# Altium PCB lm4550.PcbDoc
Units mil, origin at the board's own origin, x right, y up, seen from the top; angles counter-clockwise.
Board outline 1970 x 820 mil, 2 copper layers (Top Layer, Bottom Layer); 38 components, 32 nets, 144 pads, 42 vias.
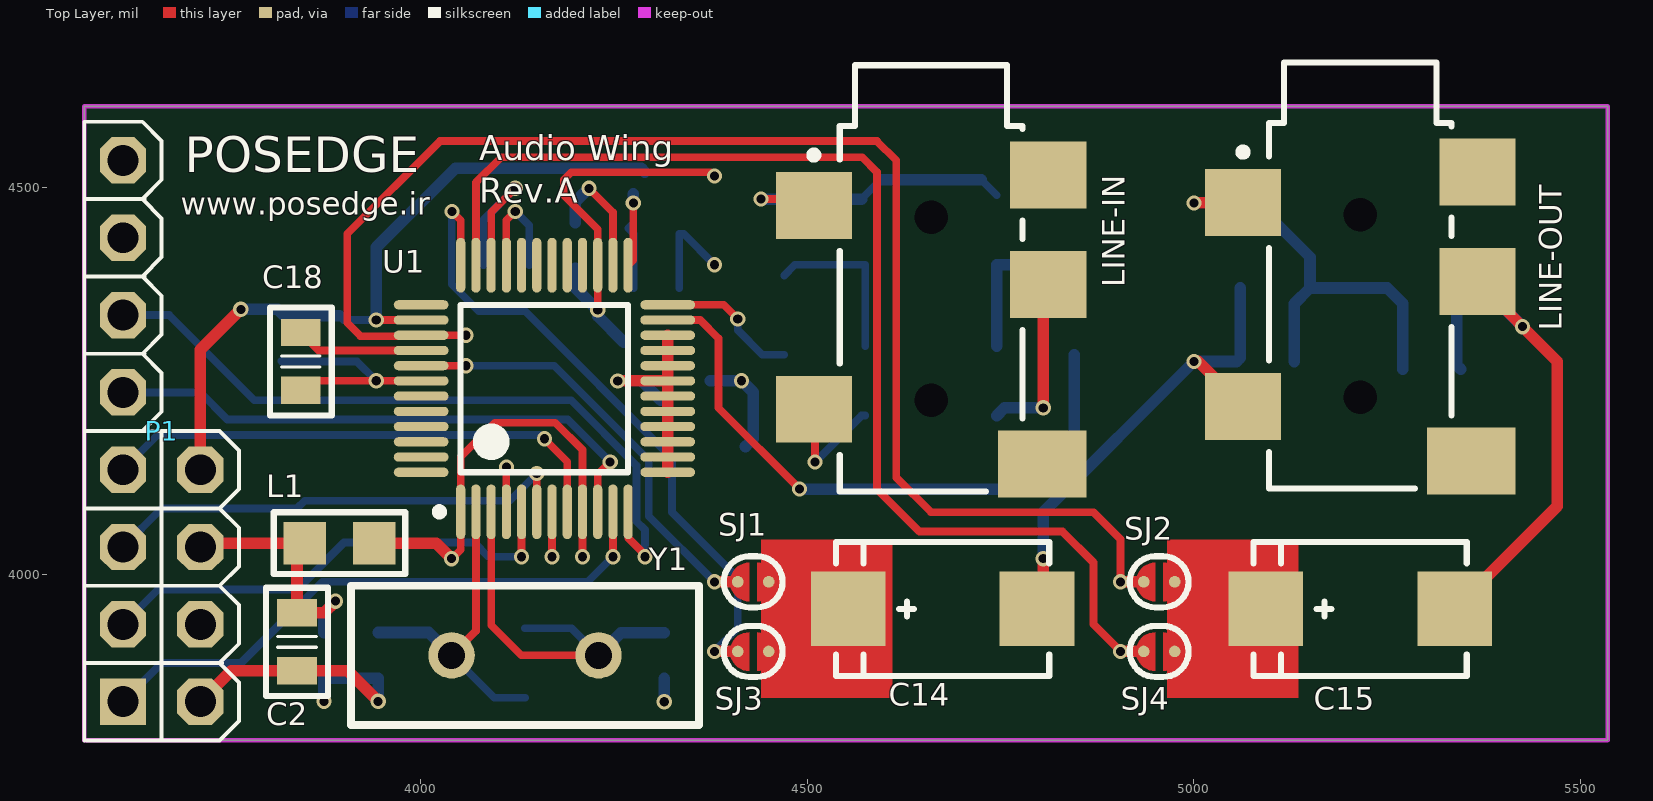
[diagram p0: Top Layer view]
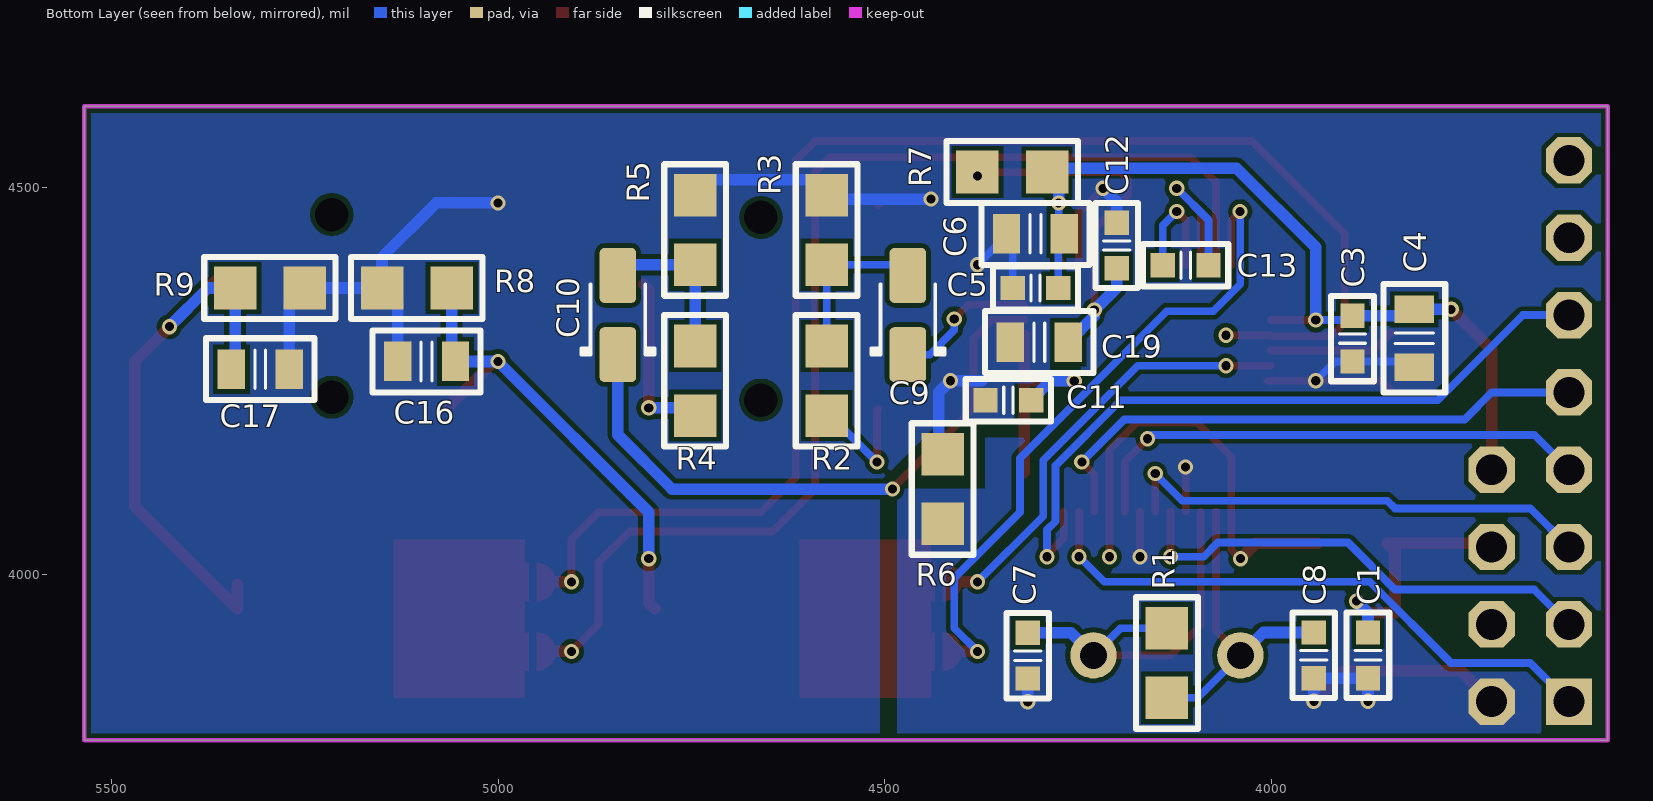
[diagram p1: Bottom Layer view, seen from below]

## Layer stack, top to bottom
Top Solder: solder mask 0.4, Solder Resist, Dk 3.5
Top Layer: signal copper 1.4
Dielectric1: dielectric 12.6, FR-4, Dk 4.8
Bottom Layer: signal copper 1.4
Bottom Solder: solder mask 0.4, Solder Resist, Dk 3.5

## Board outline
3565,3785 5535,3785 5535,4605 3565,4605

## Design rules (kind name [scope] priority, off if disabled: settings)
Clearance [All] p1: gap=6
FabricationTestpoint [(IsPad And (OnTopLayer Or OnBottomLayer))] p1: side=3 testpointundercomponent=TRUE minsize=40 maxsize=100 preferedsize=60 minholesize=0 maxholesize=40 preferedholesize=32 testpointgrid=1 allowsidetop=TRUE allowsidebottom=TRUE usegrid=TRUE gridtolerance=0.01
PolygonConnect [All] p1: connectstyle=Direct reliefconductorwidth=10 reliefentries=4 polygonreliefangle="90 Angle" airgapwidth=10
RoutingVias [All] p1: holewidth=11.81 width=19.68 viastyle="Through Hole" minholewidth=11.81 minwidth=19.68 maxholewidth=11.81 maxwidth=19.68
SolderMaskExpansion [All] p1: expansion=4
Width [All] p1: maxlimit=20 minlimit=6 preferedwidth=10
29 further rules are at their usual default settings.

## Components (designator, comment, footprint, x,y, rotation, side; value= is the part's Value field where it differs from the comment)
C1 "100nF" C0603 3875,3895 r90 bottom
C2 "4.7uF" C0805 3840,3912.4 r90 top
C3 "100nF" C0603 3895,4304.53 r90 bottom
C4 "4.7uF" C0805 3815,4305 r90 bottom
C5 "100nF" C0603 4305,4370 r180 bottom
C6 "4.7uF" C0805 4305,4440 r180 bottom
C7 "33pF" C0603 4315,3894.53 r270 bottom
C8 "33pF" C0603 3945,3895 r270 bottom
C9 "1uF" CPM3216 4470,4335 r90 bottom
C10 "1uF" CPM3216 4845,4335 r90 bottom
C11 "100nF" C0603 4340,4225 r0 bottom
C12 "100nF" C0603 4200,4425 r270 bottom
C13 "22nf" C0603 4110.79,4399.45 r0 bottom
C14 "220uF" CPM7343 4675,3955 r0 top
C15 "220uF" CPM7343 5215,3955 r0 top
C16 "220pF" C0805 5092.4,4275 r180 bottom
C17 "220pF" C0805 5307.4,4265 r0 bottom
C18 "220pF" C0805 3845,4275 r90 top
C19 "3.3uF" C0805 4300,4300 r180 bottom
L1 "27uH" R0805 3895,4040 r180 top
LINE-IN "LINE-IN" PJ-386D 4660,4461.22 r270 top locked
LINE-OUT "LINE-OUT" PJ-386D 5215,4465 r270 top locked
P1 "WING8WING8_NOHOLES" WINGSIDE_8BIT_NOHOLES 3565,4585 r270 top
R1 "1M" R0805 4135,3885 r90 bottom
R2 "6.81K" R0805 4575,4250 r90 bottom
R3 "6.81K" R0805 4575,4445 r270 bottom
R4 "6.81K" R0805 4745,4250 r90 bottom
R5 "6.81K" R0805 4745,4445 r270 bottom
R6 "0R" R0805 4425,4110 r90 bottom
R7 "10K" R0805 4335,4520 r180 bottom
R8 "100K" R0805 5105,4370 r180 bottom
R9 "100K" R0805 5295,4370 r0 bottom
SJ1 "Solder Junction" "Solde Junction" 4430,3990 r180 top
SJ2 "Solder Junction" "Solde Junction" 4955,3990 r180 top
SJ3 "Solder Junction" "Solde Junction" 4430,3900 r180 top
SJ4 "Solder Junction" "Solde Junction" 4955,3900 r180 top
U1 "LM4550BVH" VBH48A_N 4160,4240 r90 top locked
Y1 "24.578MHz" HC-49-S3 4230,3895 r180 top locked

## Footprints (in the part's own frame and the unit in brackets; to place one, negate y for a bottom-side part, rotate by r counter-clockwise, add the part's x,y. Pads: shape width x height; smd on the part's side, far side on the other; paste and mask are expansions set on the pad)
C0603 [mm]
  rect 0.8x0.8 smd: 1(-0.75,0) 2(0.75,0)
  silkscreen extent -1.4,-0.7 1.4,0.7, body extent -0.8,-0.42 0.8,0.44, height 0.79
C0805 [mm]
  rect 0.9x1.3 smd: 1(-0.95,0) 2(0.95,0)
  silkscreen extent -1.78,-1.02 1.78,1.02, body extent -1,-0.6 1,0.6, height 1.5
CPM3216 [mm] "Capacitor, polarized, Molded Body, EIA 535BAAC size A; 3.20mm L X 1.60mm W X 1.80mm H"
  round 0.508 on Mech15: 0(0,0)
  rrect25% 1.8x1.2 smd: 1(-1.3,0) 2(1.3,0)
  silkscreen extent -1.3,-1.2 1,1.2, body extent -1.6,-0.8 1.6,0.8, height 1.8
CPM7343 [mm]
  rect 2.45x2.45 smd: 1(-3.1,0) 2(3.1,0)
  silkscreen extent -3.5,-2.2 3.5,2.2, body extent -3.65,-2.15 3.65,2.15, height 2.81
HC-49-S3 [mil]
  round 60 hole 35: 1(0,0) 2(190,0)
  silkscreen extent -130,-90 320,90, body extent -115,-60 305,60, height 122
PJ-386D [mm] "Phone Jack, Right Angle, SM, Body 14x6x4.8mm (LxWxH)"
  rect 2.2x2.5 smd: 1(-0.4,-3.85) 2(6.3,-3.85) 3(2.2,3.85) 4(-1.4,3.85)
  rect 2.2x2.9 smd: 10(8.1,3.65)
  round 0.8 hole 1.1 unplated: MH1(0,0) MH2(6,0)
  silkscreen extent -5,-3.97 9,3, body extent -5,-3 9,3, height 4.87
R0805 [mil]
  rect 55x55 smd: 1(-45,0) 2(45,0)
  silkscreen extent -85,-40 85,40, body extent -39,-24 39,24, height 20
"Solde Junction" [mil]
  round 15 smd: 1(-20,0) 2(20,0)
  Top Layer region: -5,-24.76 -14.57,-22.85 -22.68,-17.43 -28.1,-9.32 -30,0.24 -30,0.24 -28.1,9.81 -22.68,17.92 -14.57,23.34 -5,25.24 -5,25.24
  Top Layer region: 5,-24.76 14.57,-22.85 22.68,-17.43 28.1,-9.32 30,0.24 30,0.24 28.1,9.81 22.68,17.92 14.57,23.34 5,25.24 5,25.24
  silkscreen extent -38,-33 38,33
VBH48A_N [mm] "Thin QFP, 48-Leads, Body 7x7mm, Pitch 0.5mm, IPC Medium Density"
  oval 1.8x0.3 smd: 1(-4.05,2.75) 2(-4.05,2.25) 3(-4.05,1.75) 4(-4.05,1.25) 5(-4.05,0.75) 6(-4.05,0.25) 7(-4.05,-0.25) 8(-4.05,-0.75) 9(-4.05,-1.25) 10(-4.05,-1.75) 11(-4.05,-2.25) 12(-4.05,-2.75) 25(4.05,-2.75) 26(4.05,-2.25) 27(4.05,-1.75) 28(4.05,-1.25) 29(4.05,-0.75) 30(4.05,-0.25) 31(4.05,0.25) 32(4.05,0.75) 33(4.05,1.25) 34(4.05,1.75) 35(4.05,2.25) 36(4.05,2.75)
  oval 0.3x1.8 smd: 13(-2.75,-4.05) 14(-2.25,-4.05) 15(-1.75,-4.05) 16(-1.25,-4.05) 17(-0.75,-4.05) 18(-0.25,-4.05) 19(0.25,-4.05) 20(0.75,-4.05) 21(1.25,-4.05) 22(1.75,-4.05) 23(2.25,-4.05) 24(2.75,-4.05) 37(2.75,4.05) 38(2.25,4.05) 39(1.75,4.05) 40(1.25,4.05) 41(0.75,4.05) 42(0.25,4.05) 43(-0.25,4.05) 44(-0.75,4.05) 45(-1.25,4.05) 46(-1.75,4.05) 47(-2.25,4.05) 48(-2.75,4.05)
  silkscreen extent -4.17,-2.75 2.75,3.57, body extent -3.5,-3.5 3.5,3.5, height 1.6
WINGSIDE_8BIT_NOHOLES [mil]
  rect 60x60 hole 40: 0(750,50)
  oct 60x60 hole 40: 1(650,50) 2(550,50) 2V5@2(650,150) 3(450,50) 3V3@2(550,150) 4(350,50) 5(250,50) 5V@2(450,150) 6(150,50) 7(50,50) GND@2(750,150)
  silkscreen extent 0,0 800,200

## Part data
C1 C3 C5 C7 C8 C11 C12 C13: library part C0603, "Ceramic Capactor size 0603"
C2 C4 C6 C16 C17 C18 C19: library part C0805, "Ceramic Capactor size 0805"
C9 C10: library part CPM3216, "Tantalium Capacitor size A (3216 Metric)"
C14 C15: library part CPM7343, "Tantalium Capacitor size D (7343 Metric)"
L1: library part R0805, "SMD Chip Inductor size 0805"
LINE-IN LINE-OUT: library part TSH-3864D, "Phone Jack, PJ-386D Series, Right Angle, SM, 4-Conductor Open Circuit"
R1 R2 R3 R4 R5 R6 R7 R8 R9: library part R0805, "Chip Resistor size 0805"
U1: "AC '97 Rev 2.1 Codec with Sample Rate Conversion and National 3D Sound, 48-pin LQFP"
Y1: library part XTAL_TH, "XTAL Trough Hole"

## Via types
v1: diameter 19.68, hole 11.81, Top Layer to Bottom Layer, tented both sides, 42 vias

## Nets (pads, with @x,y where several pads share a name; then routed paths per layer and width w, separated by ;. In a path a pad name is that pad's centre, name@x,y a point inside that pad or via, vN(x,y) a via of type N, cw(c..) or ccw(c..) an arc to the next point about the centre after c; other vN are vias at no path point)
+3.3V: C1.2 C2.2 L1.2 P1.3V3@2 | length 334.4
  Top Layer w15: 3715,4035 3720,4040 L1.2 3840,4030 C2.2 3874.8,3949.8 v1(3890,3965)
  Bottom Layer w15: C1.2 3875,3950 v1(3890,3965)
+5V: C3.2 C4.2 C5.2 C6.2 P1.5V@2 R7.2 U1.25 U1.38 | length 1164.6
  Top Layer w10: v1(3942.52,4328.58) U1.38 ; U1.25 4275,4406.18 v1(4275,4480)
  Top Layer w15: 3715,4135 3715,4290 v1(3767.4,4342.4)
  Bottom Layer w10: C3.2 3900.47,4328.58 v1(3942.52,4328.58) ; v1(4275,4480) 4275,4453.94 4268.27,4447.2 4275.47,4440 C5.2
  Bottom Layer w15: v1(3767.4,4342.4) C4.2 3823.35,4334.06 C3.2 ; v1(3942.52,4328.58) 3942.52,4422.52 4045,4525 4285,4525 R7.2 ; v1(4275,4480) 4275,4491.54
AGND: C3.1 C4.1 C5.1 C6.1 C11.2 C12.1 C16.1 C17.1 C18.1 C19.1 LINE-IN.1 LINE-OUT.1 R3.1 R5.1 R6.2 R8.1 R9.1 U1.26 U1.42 | length 1724.8
  Top Layer w10: C18.1 3857.4,4250 v1(3942.52,4250) U1.42@4005,4250 ; v1(4217.48,4498.9) 4248.58,4467.8 U1.26 ; v1(4440,4485) 4500.39,4485 LINE-IN.1
  Top Layer w15: v1(5000,4480) 5062.68,4480 LINE-OUT.1
  Bottom Layer w10: C4.1@3820,4275.47 3820.47,4275 3917.52,4275 v1(3942.52,4250) ; C5.1 4334.53,4440 4340,4440 v1(4380,4400) ; R3.1@4570,4485 R3.1 R3.1@4595,4510 ; R5.1@4725,4510 R5.1
  Bottom Layer w15: C12.1 4200,4481.42 v1(4217.48,4498.9) ; 4374.53,4250 v1(4415,4250) 4430,4235 4430,4175 R6.2@4420,4165 ; v1(4440,4485) R3.1@4570,4485 ; R3.1@4595,4510 R5.1@4725,4510 ; v1(5000,4480) 5080,4480 5150,4410 R8.1 ; C16.1 5129.8,4349.8 R8.1 ; C17.1 5270,4350 R9.1 R8.1
BIT_CLK: P1.2 U1.6 | length 624
  Top Layer w10: U1.6 v1(4150.16,4130)
  Bottom Layer w10: P1.2 3665,4085 3840,4085 3850,4095 4115.16,4095 v1(4150.16,4130)
DGND: C1.1 C2.1 C7.2 C8.2 P1.GND@2 R6.1 U1.4 U1.7 | length 539
  Top Layer w10: U1.4 v1(4110.79,4138.58) ; v1(4169.84,4022.52) U1.7
  Top Layer w15: 3715,3835 3755,3875 C2.1 3905.47,3875 v1(3945,3835.47)
  Bottom Layer w15: v1(3875,3835.47) C1.1 C8.2 v1(3945,3835.47) ; v1(4315,3835) C7.2
NetC7_1: C7.1 R1.2 U1.3 Y1.1 | length 508.2
  Top Layer w10: U1.3 4091.1,3933.9 4130,3895 Y1.1
  Bottom Layer w10: R1.2 4195,3930 Y1.1
  Bottom Layer w15: Y1.1 4259.06,3924.06 C7.1
NetC8_1: C8.1 R1.1 U1.2 Y1.2 | length 423.6
  Top Layer w10: Y1.2 4071.42,3926.42 U1.2
  Bottom Layer w10: Y1.2 4095,3840 R1.1
  Bottom Layer w15: C8.1 4010.47,3924.53 Y1.2
NetC9_1: C9.1 U1.24 | length 185.6
  Top Layer w10: U1.24 4391.73,4348.27 v1(4410,4330)
  Bottom Layer w10: v1(4410,4330) 4410,4315.75 4441.93,4283.82 C9.1
NetC9_2: C9.2 R2.2 R3.2 | length 215.7
  Bottom Layer w10: C9.2 4483.82,4400 R3.2 R2.2
NetC10_1: C10.1 U1.23 | length 801.6
  Top Layer w10: U1.23 4361.42,4328.58 4385,4305 4385,4215 v1(4490,4110)
  Bottom Layer w15: v1(4490,4110) 4775,4110 4845,4180 C10.1
NetC10_2: C10.2 R4.2 R5.2 | length 210.7
  Bottom Layer w15: R4.2 R5.2 4831.18,4400 C10.2
NetC11_1: C11.1 U1.13 U1.14 U1.15 U1.16 U1.17 U1.18 U1.19 U1.20 U1.21 U1.22 | length 307.7
  Top Layer w15: v1(4254.84,4249.84) U1.19 ; U1.13 U1.14 U1.15 U1.16 U1.17 U1.18 U1.19 ; U1.22 U1.21 U1.20 U1.19
  Bottom Layer w15: v1(4254.84,4249.84) 4285.63,4249.84 C11.1
NetC12_2: C12.2 C19.2 R7.1 U1.27 | length 509.2
  Top Layer w10: v1(4228.9,4341.42) U1.27 4228.9,4446.1 4185,4490 4185,4510 4194.74,4519.74 4375.26,4519.74 v1(4380,4515)
  Bottom Layer w15: C12.2 4200,4370.31 v1(4228.9,4341.42) 4228.9,4333.7 C19.2
NetC13_1: C13.1 U1.34 | length 228.7
  Top Layer w10: U1.34 4091.1,4467.8 v1(4122.2,4498.9)
  Bottom Layer w10: C13.1 4081.26,4457.95 v1(4122.2,4498.9)
NetC13_2: C13.2 U1.33 | length 151.1
  Top Layer w10: U1.33 4110.79,4457.48 v1(4122.2,4468.9)
  Bottom Layer w10: v1(4122.2,4468.9) 4140.31,4450.79 C13.2
NetC14_1: C14.1 SJ1.1 SJ3.1
NetC14_2: C14.2 C16.2 LINE-OUT.2 R8.2 | length 643.6
  Top Layer w15: C14.2 4805,3962.95 v1(4805,4020) ; v1(5000,4275) 5005.39,4275 LINE-OUT.2
  Bottom Layer w15: v1(4805,4020) 4805,4080 v1(5000,4275) C16.2 5060,4280 R8.2
NetC15_1: C15.1 SJ2.1 SJ4.1
NetC15_2: C15.2 C17.2 LINE-OUT.3 R9.2 | length 766
  Top Layer w15: C15.2@5337.05,3987.05 C15.2 5470,4087.95 5470,4274.96 LINE-OUT.3
  Bottom Layer w15: C17.2 5340,4269.8 R9.2 5375,4370 v1(5425,4320)
NetC18_2: C18.2 U1.40 | length 165.2
  Top Layer w10: C18.2 3868.19,4289.21 U1.40
NetL1_1: L1.1 U1.1 U1.9 | length 573.4
  Top Layer w10: v1(4040,4020) 4051.73,4031.73 U1.1 4051.73,4151.73 4095.84,4195.84 4174.16,4195.84 4209.21,4160.79 U1.9 v1(4209.21,4022.52)
  Top Layer w15: L1.1 4020,4040 v1(4040,4020)
NetLINE-IN_2: LINE-IN.2 R2.1 | length 158.7
  Top Layer w10: LINE-IN.2 4510,4211.61 v1(4510,4145)
  Bottom Layer w10: v1(4510,4145) 4570,4205 R2.1
NetLINE-IN_3: LINE-IN.3 R4.1 | length 226.5
  Top Layer w15: v1(4805,4215) 4805,4368.03 LINE-IN.3
  Bottom Layer w15: R4.1 4755,4215 v1(4805,4215)
NetSJ1_2: SJ1.2 U1.41 | length 567.5
  Top Layer w10: U1.41 v1(4058.58,4269.53)
  Top Layer w15: v1(4380,3990) SJ1.2
  Bottom Layer w10: v1(4058.58,4269.53) 4172.58,4269.53 4295,4147.1 4295,4075 v1(4380,3990)
NetSJ2_2: SJ2.2 U1.39 | length 1864.4
  Top Layer w10: v1(4058.58,4308.9) U1.39 3999.39,4307.74 3922.26,4307.74 3905,4325 3905,4440 4025,4560 4590,4560 4615,4535 4615,4125 4660,4080 4870,4080 4905,4045 v1(4905,3990)
  Top Layer w15: v1(4905,3990) SJ2.2
NetSJ3_2: SJ3.2 U1.36 | length 873.8
  Top Layer w10: v1(4040.31,4468.9) 4051.73,4457.48 U1.36
  Top Layer w15: v1(4380,3900) SJ3.2
  Bottom Layer w10: v1(4040.31,4468.9) 4040.31,4374.69 4075,4340 4135,4340 4325,4150 4325,4080 4410,3995 4410,3930 v1(4380,3900)
NetSJ4_2: SJ4.2 U1.35 | length 1535.8
  Top Layer w10: U1.35 4071.42,4506.42 4104,4539 4571,4539 4590,4520 4590,4110 4645,4055 4830,4055 4870,4015 4870,3935 v1(4905,3900)
  Top Layer w15: v1(4905,3900) SJ4.2
PC_BEEP: P1.5 U1.12 | length 931.6
  Top Layer w10: U1.12 4268.27,4046.73 v1@4290,4025
  Bottom Layer w10: P1.5 3675,4335 3785,4225 4194.48,4225 4279,4140.48 4279,4068.37 4290,4057.37 v1(4290,4022.52)
RESET_N: P1.0 U1.11 | length 769.3
  Top Layer w10: v1(4248.58,4022.52) U1.11
  Bottom Layer w10: P1.0 3665,3885 3767.63,3885 3872.63,3990 4216.06,3990 v1(4248.58,4022.52)
SDATA_IN: P1.3 U1.8 | length 672.4
  Top Layer w10: v1(4160,4175) 4189.53,4145.47 U1.8
  Bottom Layer w10: P1.3 3660,4180 4155,4180 v1(4160,4175)
SDATA_OUT: P1.1 U1.5 | length 624.9
  Top Layer w10: v1(4130.47,4022.52) U1.5
  Bottom Layer w10: P1.1 3660,3980 3840,3980 3900.84,4040.84 4069.16,4040.84 4087.48,4022.52 v1(4130.47,4022.52)
SYNC: P1.4 U1.10 | length 738.4
  Top Layer w10: U1.10 4228.9,4128.9 v1(4245,4145)
  Bottom Layer w10: P1.4 3715,4235 3750,4200 4190,4200 v1(4245,4145)
pads on no net: C9.0 C10.0 LINE-IN.4 LINE-IN.10 LINE-IN.MH1 LINE-IN.MH2 LINE-OUT.4 LINE-OUT.10 LINE-OUT.MH1 LINE-OUT.MH2 P1.2V5@2 P1.6 P1.7 U1.28 U1.29 U1.30 U1.31 U1.32 U1.37 U1.43 U1.44 U1.45 U1.46 U1.47 U1.48

## Polygon pours and split planes (outlines as drawn)
DGND on Bottom Layer "BL_DGND" (solid, remove dead copper, pour order 3): 3565,3785 3565,4181 3574.18,4176.43 4370,4176.43 4370,4110.24 4483.5,4110.24 4483.5,3794.76 4485,3785 4478.5,3785
AGND on Bottom Layer "BL_AGND" (solid, remove dead copper, pour order 2): 3565,4194.86 3574.18,4199.43 4422.07,4199.43 4430.2,4196.06 4503.11,4123.15 4506.5,4115 4506.5,3790 4505.36,3785 5535,3785 5535,4605 3565,4605

## Keep-outs
Keep-Out Layer:
  the board outline again, w6

## Other copper
Top Layer:
  rectangle net NetC15_1: 4965,3840 5135,4045
  rectangle net NetC14_1: 4440,3840 4610,4045

## Silkscreen, mask and mechanical layers (free items; w line width, h text height)
Top Overlay:
  text "POSEDGE" at 3695,4505 h78
  text "Audio Wing  / Rev.A" at 4076,4469 h55
  text "www.posedge.ir" at 3690,4455 h50

## Dimensions
5535,4605 to 5535,3785 on Mechanical 1
3565,3770 to 5535,3785 on Mechanical 1